# EAGLE board capacitive_touch_board_LEFT (EAGLE 9.3.0)
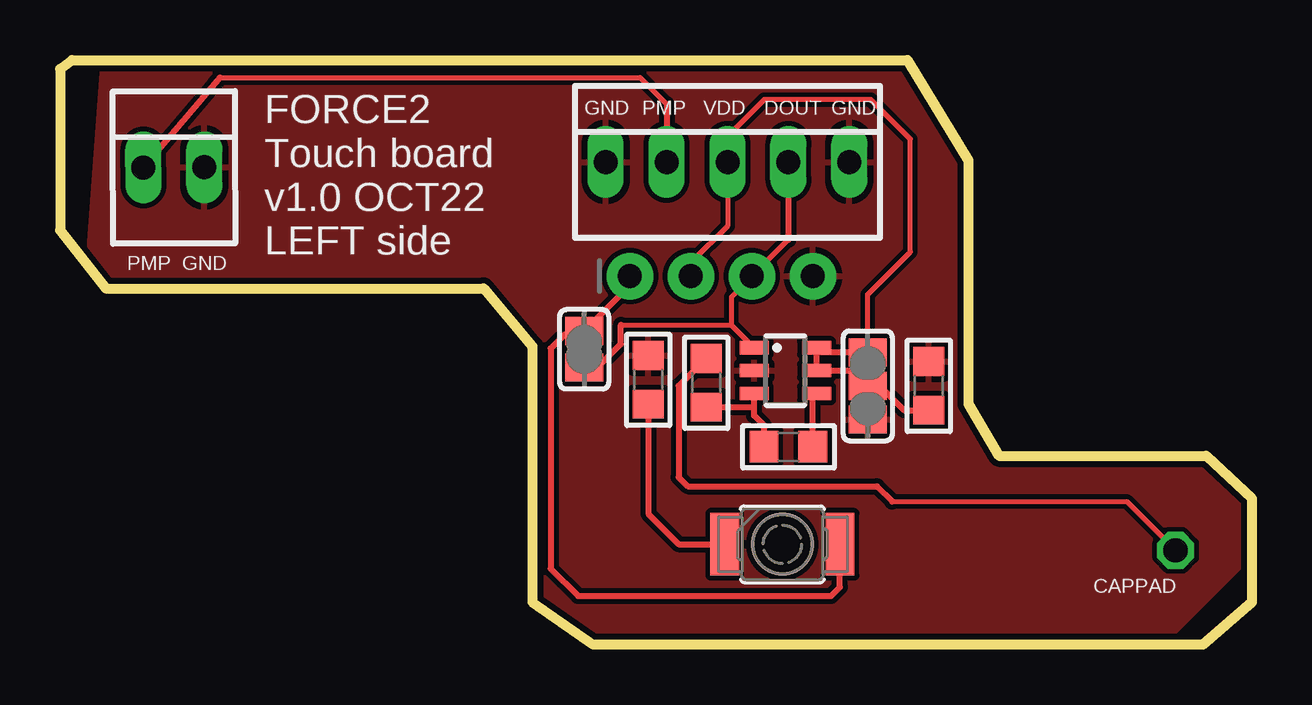
[diagram p0: board, top side]
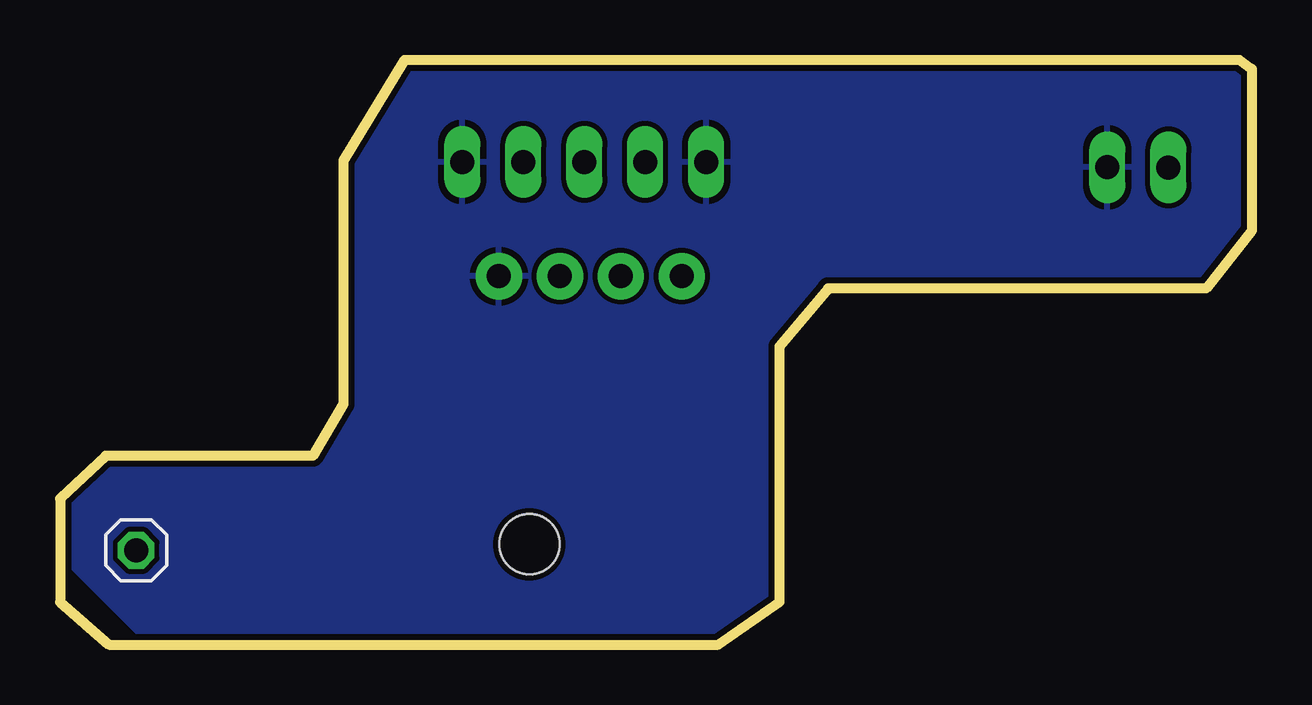
[diagram p1: board, bottom side, seen from below]

Size 49.66 x 24.38 mm. Coordinates in mm from the lower left corner, seen from the top.
Outline: 0.51,24.38 0,24 0,17.27 1.91,14.86 17.65,14.86 19.69,12.45 19.69,1.78 22.23,0 47.62,0 49.66,1.78 49.66,6.1 47.75,7.87 39.12,7.87 37.85,10.03 37.85,20.19 35.31,24.38 0.51,24.38
Copper layers (1*16): Top 0.035mm / dielectric 1.5mm / Bottom 0.035mm
Design rules "adafruit *": minimum track width 8mil, minimum drill 16mil, track to track 8mil, track to pad 8mil, pad to pad 8mil, via to via 8mil, smd to smd 8mil, copper to edge 10mil, drill to drill 8mil, minimum pad ring 10mil, minimum via ring 8mil, stop-mask expansion 4mil, vias tented up to drill 20mil, thermal gap 10mil
tRestrict: area -32.1,-1 to -20.6,11

## Footprints (pad centres in the part's own frame; a part is rotated, then mirrored left to right if it is on the bottom)
_0805 = smd 1.2 x 1.3: 1 -1.016,0; 2 1.016,0
1X04_ROUND_76 = drill 1 pad 1.93: 1 -3.81,0; 2 -1.27,0; 3 1.27,0; 4 3.81,0
1X01 = drill 1.016 octagon: 1 0,0
PLCC2_REVMOUNT = smd 1.2 x 2.6: A 2.4,0; K -2.4,0 | hole 2.5: 0,0
SOLDERJUMPER_CLOSEDWIRE = smd 1.168 x 1.6: 1 -0.762,0; 2 0.762,0 | smd 0.635 x 0.203: WIRE 0,0
SOLDERJUMPER_2WAY_OPEN_NOPASTE = smd 1.168 x 1.6: 1 -1.397,0; 2 0,0; 3 1.397,0
SOT23-6 = smd 0.55 x 1.2: 1 -0.95,-1.3; 2 0,-1.3; 3 0.95,-1.3; 4 0.95,1.3; 5 0,1.3; 6 -0.95,1.3
22-23-2051 = drill 1 long: 1 -5.08,0; 2 -2.54,0; 3 0,0; 4 2.54,0; 5 5.08,0
22-23-2021 = drill 1 long: 1 -1.27,0; 2 1.27,0

## Placement (x,y rotation side)
C1  22nF  [_0805]  30.35,8.26 0 top
C3  0.1µF  [_0805]  36.2,10.79 90 top
JP1  [1X04_ROUND_76]  27.56,15.37 0 top
JP2  [1X01]  46.48,3.94 0 bottom
LED1  LS T77K-J1L2-1-0-2-R18-Z  [PLCC2_REVMOUNT]  30.1,4.19 0 top
R1  10K  [_0805]  26.92,10.92 90 top
R2  1K  [_0805]  24.51,11.05 90 top
SJ1  LED  [SOLDERJUMPER_CLOSEDWIRE]  21.84,12.32 90 top
SJ2  MODE  [SOLDERJUMPER_2WAY_OPEN_NOPASTE]  33.65,10.79 270 top
U1  AT42QT1010  [SOT23-6]  30.23,11.43 270 top
X1  22-23-2051  [22-23-2051]  27.81,20.13 0 top
X2  22-23-2021  [22-23-2021]  4.75,19.91 0.1 top

## Library data of the parts
C1 C3 JP1 LED1 R1 R2 SJ1 SJ2 U1 = microbuilder
JP2 = pinhead
X1 = con-molex; MF: MOLEX; MPN: 22-23-2051; OC_FARNELL: 1462952; OC_NEWARK: 38C9178
X2 = con-molex; MF: MOLEX; MPN: 22-23-2021; OC_FARNELL: 1462926; OC_NEWARK: 25C3832

## Nets
CAPPAD: JP2.1 R1.2
GND: C3.2 JP1.4 R2.2 SJ2.3 U1.2 X1.1 X1.5 X2.2
LEDA: JP1.1 LED1.A SJ1.2
N$3: C1.2 U1.4
N$4: C1.1 R1.1 U1.3
N$6: LED1.K R2.1
OUT: JP1.3 SJ1.1 U1.1 X1.4
PUMP: X1.2 X2.1
VDD: C3.1 JP1.2 SJ2.1 SJ2.2 U1.5 U1.6 X1.3

## Tracks (layer width: path | path; a pad name or v marks a point on that pad's centre or on a via)
CAPPAD
  Top 0.203: 34.67,5.97 44.45,5.97 JP2.1
  Top 0.254: R1.2 25.78,10.79 25.78,6.98 26.16,6.6 34.04,6.6 34.67,5.97
GND
  pour Top: 2.09,28.96 53.09,28.96 55.88,26.16 55.88,9.91 39.5,-6.48 7.24,-6.48 0.01,0.76
  pour Bottom: 0.13,26.67 52.96,26.67 55.75,23.88 55.75,9.78 35.69,-10.29 34.93,-9.53 7.11,-9.53 -0.38,-2.03 -0.38,26.16
LEDA
  Top 0.254: JP1.1 23.75,14.99 SJ1.2 21.7,12.94 21.03,12.94 20.45,12.36 20.45,3.17 21.59,2.03 32.13,2.03 32.5,2.4 LED1.A
N$3
  Top 0.254: C1.2 31.37,10.32 U1.4
N$4
  Top 0.254: C1.1 29.34,9.14 28.93,9.55 28.93,9.91 | 28.93,9.91 U1.3 | R1.1 28.93,9.91
N$6
  Top 0.254: R2.1 24.51,5.46 25.78,4.19 LED1.K
OUT
  Top 0.203: 27.97,13.33 U1.1 | 23.37,13.33 27.97,13.33 | 30.35,16.89 JP1.3 27.97,14.51 27.97,13.33
  Top 0.254: X1.4 30.35,16.89 | SJ1.1 21.98,11.7 22.53,11.7 23.37,12.54 23.37,13.33 | U1.1 28.93,12.51
PUMP
  Top 0.203: 6.66,23.65 24.17,23.65 25.27,22.54
  Top 0.254: 25.27,22.54 X1.2 | 6.53,23.49 6.45,23.39 | 6.66,23.65 6.45,23.39 | 6.45,23.39 X2.1
VDD
  Top 0.203: SJ2.1 33.65,14.6 35.43,16.38 35.43,21.08 33.78,22.73 29.34,22.73 27.81,21.21 X1.3 27.81,17.46 26.29,15.94 JP1.2
  Top 0.254: SJ2.1 31.71,12.19 31.54,12.36 | 31.54,12.36 U1.6 | 31.54,12.36 31.53,12.35 U1.5 33.02,11.43 SJ2.2 34.16,10.79 35.18,9.78 C3.1

## Text on the board
bPlace: AT42QT1010 | LEDA | VDD | OUT | GND
tNames: GND | PMP | VDD | DOUT | GND | PMP | GND | FORCE2 / Touch board / v1.0 OCT22 / LEFT side | CAPPAD